# Altium PCB PCB1.PcbDoc
Units mm, origin at the board's own origin, x right, y up, seen from the top; angles counter-clockwise.
Board outline 152.4 x 101.6 mm, 2 copper layers (Top Layer, Bottom Layer); 27 components, 34 nets, 126 pads, 0 vias.
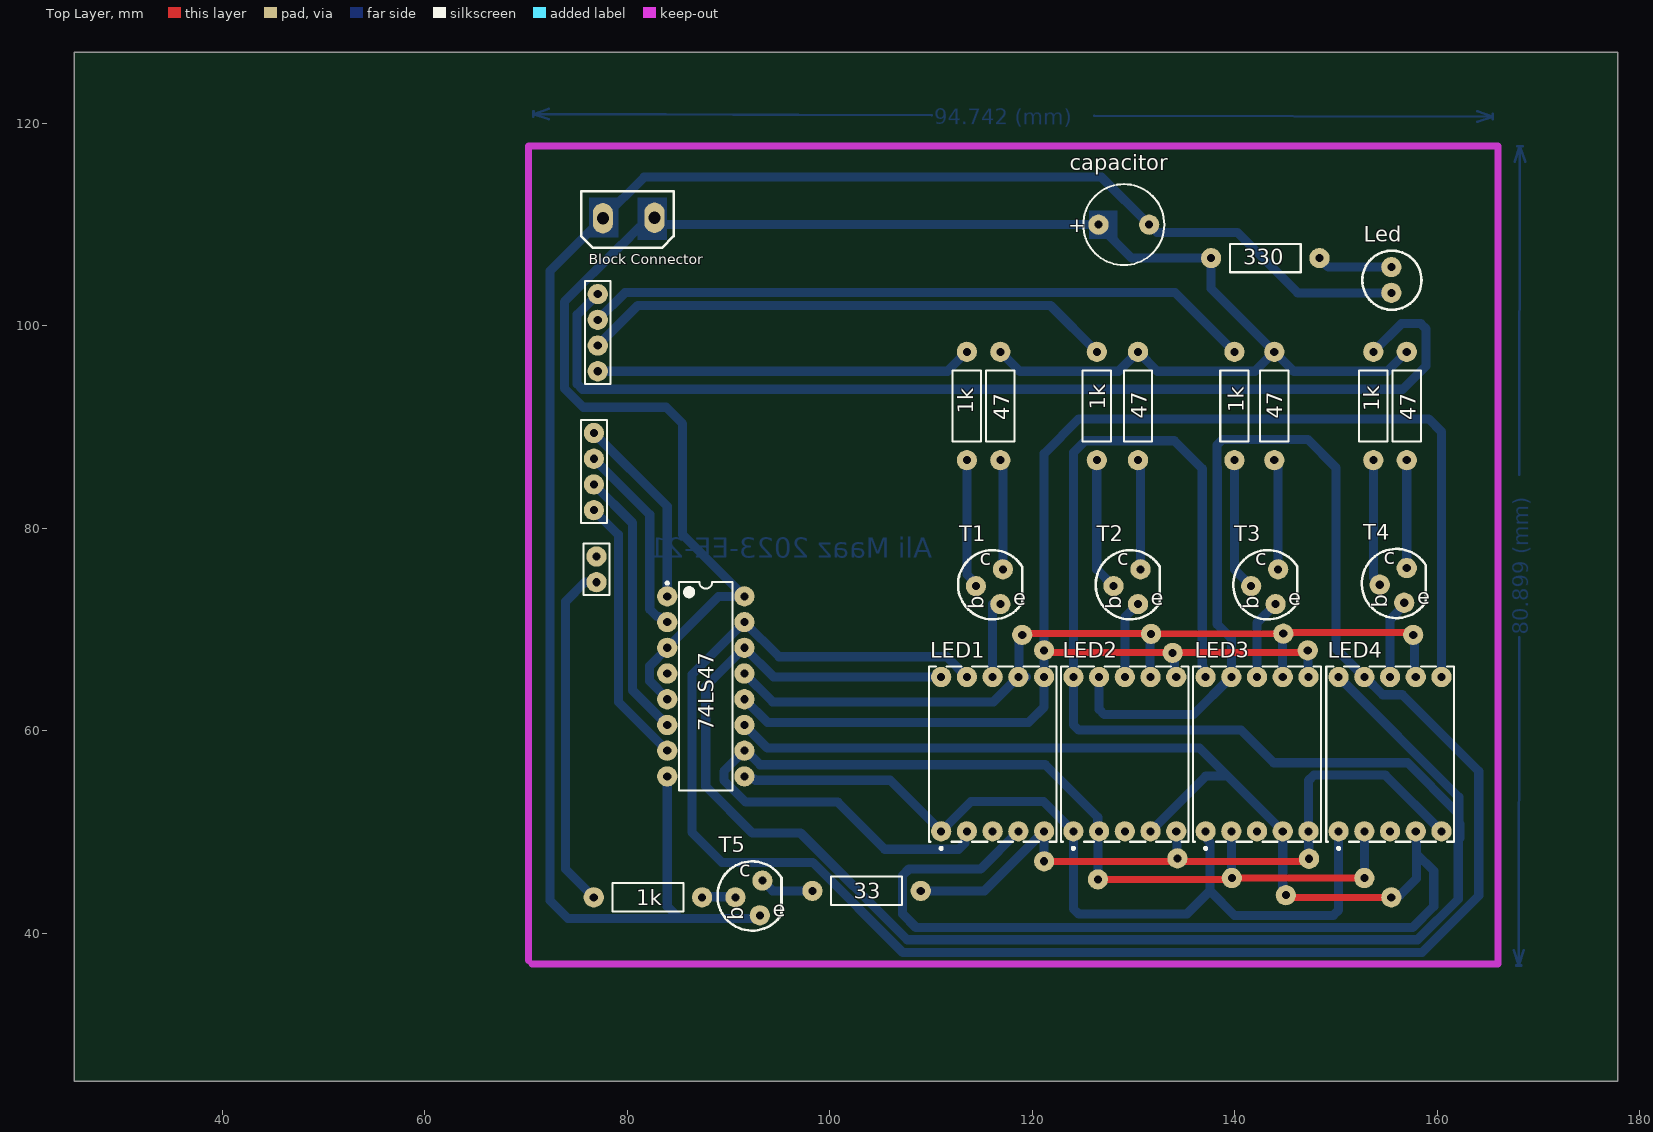
[diagram p0: Top Layer view]
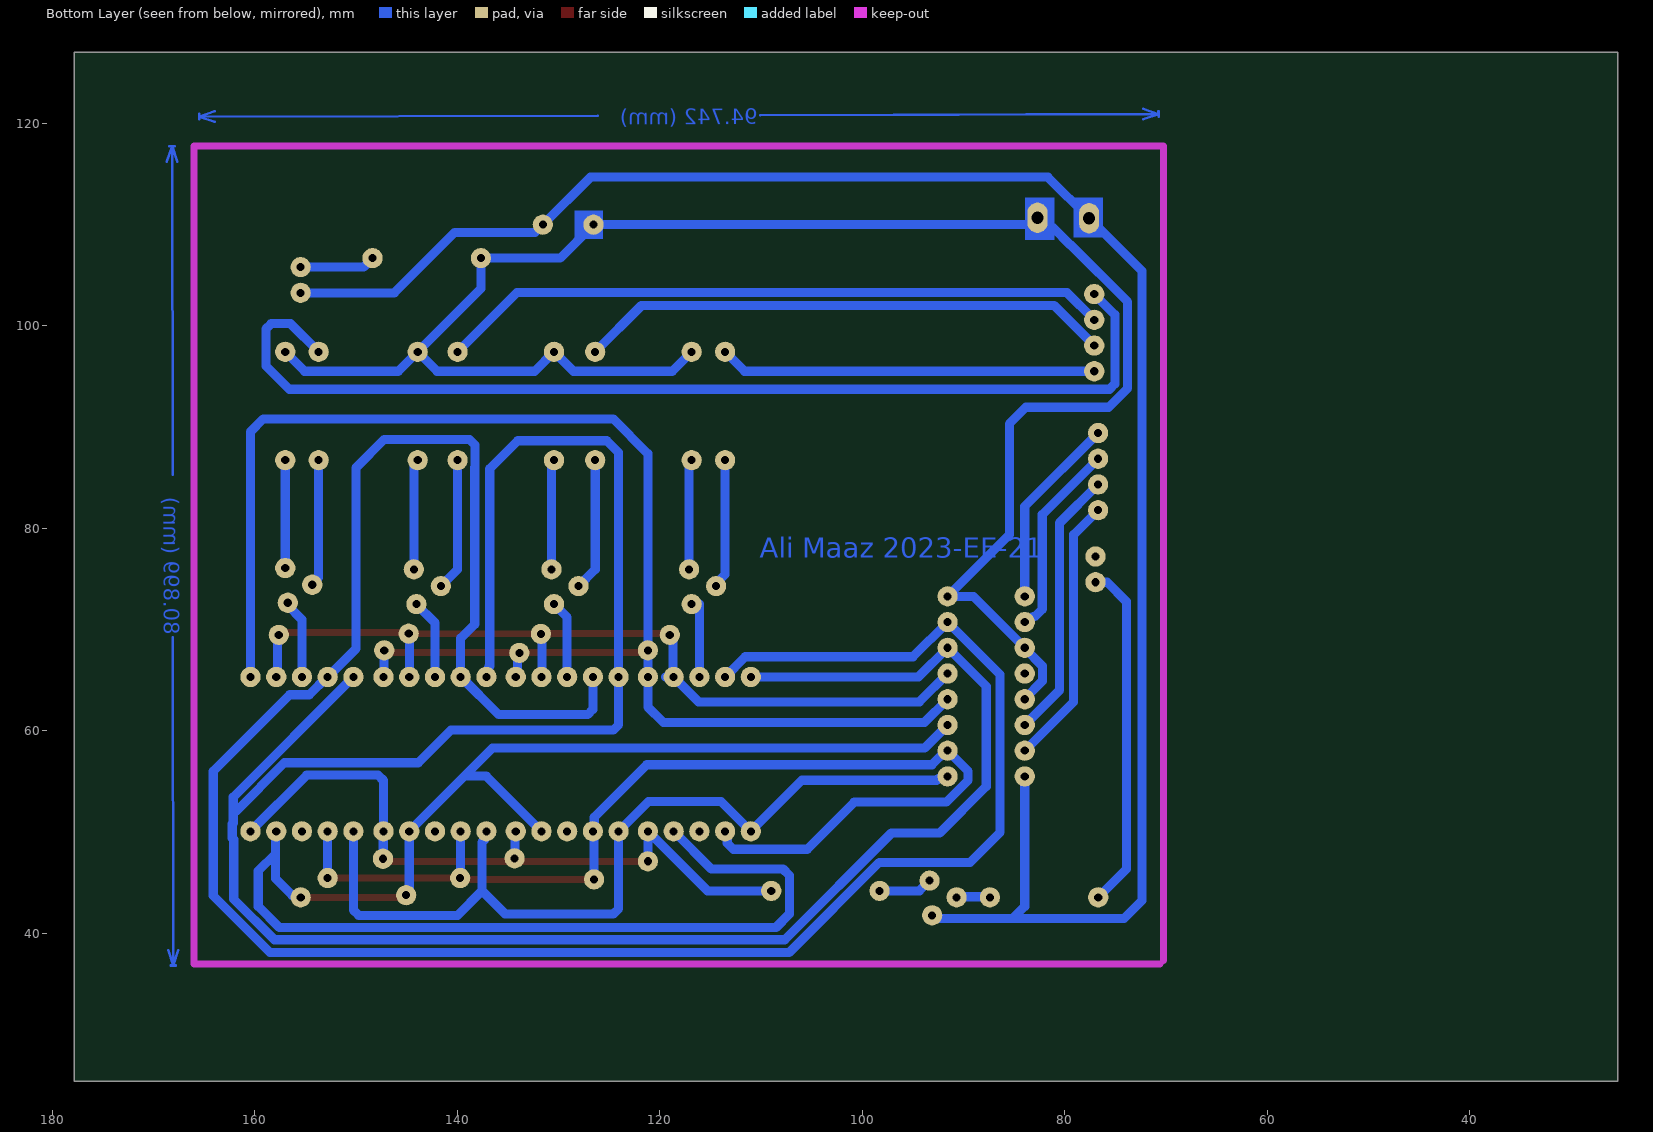
[diagram p1: Bottom Layer view, seen from below]

## Layer stack, top to bottom
Top Solder: solder mask 0.0102, Solder Resist, Dk 3.5
Top Layer: signal copper 0.0356
Dielectric 1: dielectric 0.32, FR-4, Dk 4.8
Bottom Layer: signal copper 0.0356
Bottom Solder: solder mask 0.0102, Solder Resist, Dk 3.5

## Board outline
25.4,25.4 177.8,25.4 177.8,127 25.4,127

## Design rules (kind name [scope] priority, off if disabled: settings)
Clearance [All] p1: gap=0.3 ignorepadtopadclearanceinfootprint=FALSE
PolygonConnect [All] p1: connectstyle=Relief reliefconductorwidth=0.254 reliefentries=4 polygonreliefangle="90 Angle" airgapwidth=0.254
RoutingVias [All] p1: holewidth=0.711 width=1.27 viastyle="Through Hole" minholewidth=0.711 minwidth=1.27 maxholewidth=0.711 maxwidth=1.27
SolderMaskExpansion [All] p1: expansion=0.102 istentingtop=FALSE
Width [All] p1: maxlimit=1 minlimit=0.254 preferedwidth=0.9 toplayer_prefwidth=0.6 bottomlayer_minwidth=0.7 minimp=50.000000 maximp=50.000000 favimp=50.000000
30 further rules are at their usual default settings.

## Components (designator, comment, footprint, x,y, rotation, side; value= is the part's Value field where it differs from the comment)
1k "Comment" RES10.7-7X2.8 82.042,43.561 r0 top
1k "Comment" RES10.7-7X2.8 153.67,92.075 r90 top
1k "Comment" RES10.7-7X2.8 139.954,92.075 r90 top
1k "Comment" RES10.7-7X2.8 126.365,92.075 r270 top
1k "Comment" RES10.7-7X2.8 113.538,92.075 r90 top
33 "Comment" RES10.7-7X2.8 103.632,44.196 r0 top
47 "Comment" RES10.7-7X2.8 156.972,92.075 r90 top
47 "Comment" RES10.7-7X2.8 143.891,92.075 r90 top
47 "Comment" RES10.7-7X2.8 130.429,92.075 r90 top
47 "" RES10.7-7X2.8 116.84,92.075 r90 top
74LS47 "Comment" DIP-16 87.757,64.389 r0 top
330 "Comment" RES10.7-7X2.8 143.002,106.68 r0 top
capacitor "Comment" CAPPR5-8x5 129.032,109.982 r0 top
Led "Comment" LED 155.448,104.521 r0 top
LED1 "Comment" LEDDIP-10/14.27RHD 116.078,57.697 r0 top
LED2 "Comment" LEDDIP-10/14.27RHD 129.132,57.697 r0 top
LED3 "Comment" LEDDIP-10/14.27RHD 142.187,57.697 r0 top
LED4 "Comment" LEDDIP-10/14.27RHD 155.321,57.697 r0 top
T1 "Comment" "TO-92 Packaging" 115.76,74.231 r0 top
T2 "Comment" "TO-92 Packaging" 129.35,74.231 r0 top
T3 "Comment" "TO-92 Packaging" 142.939,74.231 r0 top
T4 "Comment" "TO-92 Packaging" 155.638,74.358 r0 top
T5 "Comment" "TO-92 Packaging" 92.011,43.497 r0 top
? "Comment" HDR1X2 76.962,77.216 r270 top
? "Comment" HDR1X4 76.708,81.788 r90 top
? "Comment" HDR1X4 77.089,95.504 r90 top
? "Comment" "PCB Block Connector" 80.144,110.64 r0 top

## Footprints (in the part's own frame and the unit in brackets; to place one, negate y for a bottom-side part, rotate by r counter-clockwise, add the part's x,y. Pads: shape width x height; smd on the part's side, far side on the other; paste and mask are expansions set on the pad)
CAPPR5-8x5 [mm] "Capacitor, Electrolytic, Radial; Body 8 x 5 mm (Dia.xH typ); Pin Spacing 5 mm (typ)"
  round 2 hole 0.8: 1(-2.5,0) 2(2.5,0)
  silkscreen extent -4,-4 4,4
DIP-16 [mm] "DIP; 16 Leads; Row Spacing 7.62 mm; Pitch 2.54 mm"
  round 2 hole 0.8: 1(-3.81,8.89) 2(-3.81,6.35) 3(-3.81,3.81) 4(-3.81,1.27) 5(-3.81,-1.27) 6(-3.81,-3.81) 7(-3.81,-6.35) 8(-3.81,-8.89) 9(3.81,-8.89) 10(3.81,-6.35) 11(3.81,-3.81) 12(3.81,-1.27) 13(3.81,1.27) 14(3.81,3.81) 15(3.81,6.35) 16(3.81,8.89)
  silkscreen extent -3.93,-10.3 2.65,10.31, body extent -3.6,-10.28 3.6,10.28, height 5.08
HDR1X2 [mm]
  round 2 hole 0.8: 1(0,0) 2(2.54,0)
  silkscreen extent -1.27,-1.27 3.81,1.27
HDR1X4 [mm] "Connector; Header; 4 Position"
  round 2 hole 0.8: 1(0,0) 2(2.54,0) 3(5.08,0) 4(7.62,0)
  silkscreen extent -1.27,-1.27 8.89,1.27
LED [mm]
  round 2 hole 0.8: 1(0,1.27) 2(0,-1.27)
  silkscreen extent -2.87,-2.95 2.98,2.89
LEDDIP-10/14.27RHD [mm] "LED, 7-Segment Display, 14.27 mm, RHD; 10 Leads; Row Space 15.24 mm; Pitch 2.54 mm"
  round 2 hole 0.8: 1(-5.08,-7.62) 2(-2.54,-7.62) 3(0,-7.62) 4(2.54,-7.62) 5(5.08,-7.62) 6(5.08,7.62) 7(2.54,7.62) 8(0,7.62) 9(-2.54,7.62) 10(-5.08,7.62)
  silkscreen extent -6.3,-9.42 6.3,8.65, body extent -6.3,-8.65 6.3,8.65, height 8.3
"PCB Block Connector" [mm]
  oval 2x3 hole 1.2: 1(-2.547,-0.023) 2(2.547,0.023)
  silkscreen extent -4.7,-2.94 4.44,2.65
RES10.7-7X2.8 [mm] "Resistor, Axial; Body 7 x 2.8 mm (LxDia. max), Lead Dia. 0.7 mm (max)"
  round 2 hole 0.8: 1(-5.35,0) 2(5.35,0)
  silkscreen extent -3.5,-1.4 3.5,1.4
"TO-92 Packaging" [mm] "for 2N3904"
  round 2 hole 0.8: T(-1.333,0.064) T(1.079,-1.714) T(1.333,1.714)
  silkscreen extent -3.1,-3.23 3.22,3.61

## Free pads (board coordinates)
  round 2 hole 0.8: 3(118.999,69.469) 4(131.724,69.571) 5(144.78,69.596) 6(157.607,69.469) 7(133.858,67.691) 8(147.193,67.945) 9(121.158,67.945) 10(121.158,47.117) 12(134.328,47.409) 13(134.328,47.409) 14(134.328,47.409) 16(147.32,47.371) 20(126.479,45.326) 21(139.7,45.466) 22(152.781,45.466) 23(145.034,43.772) 24(155.444,43.557)

## Nets (pads, with @x,y where several pads share a name; then routed paths per layer and width w, separated by ;. In a path a pad name is that pad's centre, name@x,y a point inside that pad or via, vN(x,y) a via of type N, cw(c..) or ccw(c..) an arc to the next point about the centre after c; other vN are vias at no path point)
a: 47.2 74LS47.3 74LS47.5 74LS47.16 330.1 ?.2@82.691,110.662 capacitor.1 | length 183.4
  Bottom Layer w0.9: 74LS47.5 83.947,63.181 82.197,64.931 82.197,66.384 83.947,68.134 74LS47.3 89.027,73.279 74LS47.16 85.471,79.375 85.471,90.308 83.831,91.948 75.665,91.948 73.787,93.826 73.787,102.362 79.387,107.962 79.432,107.962 81.149,109.68 81.911,109.68 82.447,110.217 82.447,110.662 82.691,110.662 83.371,109.982 capacitor.1 129.834,106.68 330.1 137.652,103.664 47.2@143.891,97.425 ; 47.2@116.84,97.425 118.761,95.504 128.508,95.504 130.429,97.425 132.35,95.504 141.97,95.504 47.2@143.891,97.425 ; 47.2@156.972,97.425 155.051,95.504 145.812,95.504 47.2@143.891,97.425
a2: 330.2 Led.1 | length 7.5
  Bottom Layer w0.9: 330.2 149.241,105.791 Led.1
a3: 1k.2@87.392,43.561 T5.T@90.678,43.561 | length 3.4
  Bottom Layer w0.9: 1k.2@87.392,43.561 87.447,43.616 90.075,43.616 90.075,43.561 T5.T@90.678,43.561
a4: 1k.1@76.692,43.561 ?.2@76.962,74.676 | length 33.2
  Bottom Layer w0.9: 75.946,74.676 75.819,74.676 73.914,72.771 73.914,46.339 1k.1@76.692,43.561
b: 1k.1@113.538,86.725 T1.T@114.427,74.295 | length 12.8
  Bottom Layer w0.9: 1k.1@113.538,86.725 113.538,75.452 114.427,74.563 T1.T@114.427,74.295
b1: 1k.2@126.365,86.725 T2.T@128.016,74.295 | length 13.1
  Bottom Layer w0.9: 1k.2@126.365,86.725 126.365,75.946 T2.T@128.016,74.295
b2: 1k.1@139.954,86.725 T3.T@141.605,74.295 | length 13.1
  Bottom Layer w0.9: 1k.1@139.954,86.725 139.954,75.946 T3.T@141.605,74.295
b3: 1k.1@153.67,86.725 T4.T@154.305,74.422 | length 12.8
  Bottom Layer w0.9: 1k.1@153.67,86.725 153.67,75.144 154.305,74.509 T4.T@154.305,74.168
c: LED1.8 T1.T@116.84,72.517 | length 8
  Bottom Layer w0.9: LED1.8 116.078,72.517 T1.T@116.84,72.517
c1: LED2.8 T2.T@130.429,72.517 | length 7.7
  Bottom Layer w0.9: LED2.8 129.132,71.22 T2.T@130.429,72.517
c2: LED3.8 T3.T@144.018,72.517 | length 8
  Bottom Layer w0.9: LED3.8 142.187,70.672 144.018,72.503 T3.T@144.018,72.517
c3: LED4.8 T4.T@156.718,72.644 | length 7.7
  Bottom Layer w0.9: LED4.8 155.321,70.993 T4.T@156.718,72.39
co: 47.1@116.84,86.725 T1.T@117.094,75.946 | length 11
  Bottom Layer w0.9: 47.1@116.84,86.725 116.84,86.35 117.094,86.35 T1.T@117.094,75.946
co1: 47.1@130.429,86.725 T2.T@130.683,75.946 | length 10.9
  Bottom Layer w0.9: 47.1@130.429,86.725 130.573,86.581 130.573,86.051 130.683,85.941 T2.T@130.683,75.946
co2: 47.1@143.891,86.725 T3.T@144.272,75.946 | length 10.9
  Bottom Layer w0.9: 47.1@143.891,86.725 143.891,86.522 144.272,86.141 T3.T@144.272,75.946
co3: 47.1@156.972,86.725 T4.T@156.972,76.073 | length 10.9
  Bottom Layer w0.9: T4.T@156.972,75.819 47.1@156.972,86.725
d: 1k.2@113.538,97.425 ?.1@77.089,95.504 | length 37.2
  Bottom Layer w0.9: ?.1@77.089,95.504 111.617,95.504 1k.2@113.538,97.425
d1: 1k.1@126.365,97.425 ?.2@77.089,98.044 | length 52.8
  Bottom Layer w0.9: ?.2@77.089,98.044 81.043,101.998 121.792,101.998 1k.1@126.365,97.425
d2: 1k.2@139.954,97.425 ?.3@77.089,100.584 | length 66.4
  Bottom Layer w0.9: ?.3@77.089,100.584 79.779,103.274 134.105,103.274 1k.2@139.954,97.425
d3: 1k.2@153.67,97.425 ?.4@77.089,103.124 | length 104.9
  Bottom Layer w0.9: ?.4@77.089,103.124 75.057,101.092 75.057,94.253 75.584,93.726 156.562,93.726 158.877,96.041 158.877,99.676 158.35,100.203 156.448,100.203 1k.2@153.67,97.425
do: 33.2 LED1.5 LED2.5 LED3.5 LED4.5 pad.10 pad.12 pad.13 pad.14 pad.16 | length 70.9
  Top Layer w0.7: LED1.5@121.031,49.95 LED1.5 ; pad.10 133.735,47.117 134.116,47.498 pad.14 134.706,47.409 134.999,47.117 146.457,47.117 146.921,47.582 pad.16 ; LED2.5 LED2.5@134.261,50.028 ; LED3.5 LED3.5@147.342,50.002
  Bottom Layer w0.9: 33.2 115.277,44.196 120.755,49.674 121.094,50.013 LED1.5 121.158,47.669 120.904,47.415 pad.10 ; LED2.5 134.289,50 134.289,47.575 pad.14 ; pad.16 147.293,47.652 147.293,50.05 LED3.5 147.267,55.099 147.794,55.626 154.852,55.626 LED4.5
f: 74LS47.15 LED1.9 LED2.9 LED3.9 LED4.9 | length 236
  Bottom Layer w0.9: LED1.9 111.545,67.31 94.996,67.31 74LS47.15 86.38,65.552 86.38,49.984 89.348,47.015 98.309,47.015 107.225,38.1 158.461,38.1 164.084,43.723 164.084,56.007 156.524,63.567 154.596,63.567 152.846,65.317 LED4.9 149.987,68.111 149.987,85.979 147.193,88.773 138.788,88.773 138.25,88.235 138.25,86.036 138.261,86.025 138.261,70.527 139.647,69.141 LED3.9 139.612,65.317 135.89,61.595 127.119,61.595 126.592,62.122 LED2.9
g: 74LS47.14 LED1.10 LED2.10 LED3.10 LED4.10 | length 248.4
  Bottom Layer w0.9: LED1.10 94.449,65.317 74LS47.14 87.757,64.389 87.757,54.508 92.354,49.911 97.111,49.911 107.652,39.37 158.034,39.37 162.052,43.388 162.052,49.253 162.204,49.405 162.204,50.795 162.105,50.894 162.105,52.026 162.105,53.453 LED4.10 ; LED3.10 136.896,65.527 136.896,66.277 136.779,66.394 136.779,85.875 134.008,88.646 125.222,88.646 124.052,87.476 LED2.10 124.052,60.598 124.579,60.071 140.614,60.071 143.84,56.845 157.055,56.845 161.874,52.026
gnd: 74LS47.8 ?.1@77.597,110.617 capacitor.2 Led.2 T5.T@93.091,41.783 | length 190.1
  Bottom Layer w0.9: 74LS47.8 83.947,42.672 85.166,41.453 ; T5.T@93.091,41.783 93.091,41.453 85.166,41.453 ; Led.2 146.202,103.251 140.233,109.22 132.294,109.22 capacitor.2 126.833,114.681 81.661,114.681 77.597,110.617 72.39,105.41 72.39,43.231 74.168,41.453 85.166,41.453
k1: 74LS47.1 ?.4@76.708,89.408 | length 19.1
  Bottom Layer w0.9: ?.4@76.708,89.408 83.947,82.169 74LS47.1
k2: 74LS47.2 ?.3@76.708,86.868 | length 19.4
  Bottom Layer w0.9: ?.3@76.708,86.868 82.22,81.356 82.22,72.011 82.957,71.273 83.115,71.273 83.649,70.739 74LS47.2
k3: 74LS47.6 ?.2@76.708,84.328 | length 26.7
  Bottom Layer w0.9: ?.2@76.708,84.328 80.518,80.518 80.518,64.008 74LS47.6
k4: 74LS47.7 ?.1@76.708,81.788 | length 26.7
  Bottom Layer w0.9: ?.1@76.708,81.788 79.121,79.375 79.121,62.865 74LS47.7
p: 74LS47.13 LED1.7 LED2.7 LED3.7 LED4.7 pad.3 pad.4 pad.5 pad.6 | length 86.2
  Top Layer w0.7: pad.3 119.248,69.601 120.054,69.601 120.059,69.596 131.699,69.596 pad.4 pad.5 144.902,69.591 145.581,69.591 145.713,69.723 157.001,69.723 157.255,69.469 pad.6 ; LED2.7@131.622,65.367 LED2.7
  Bottom Layer w0.9: 74LS47.13 94.361,62.865 116.166,62.865 LED1.7 ; pad.3 118.681,69.151 118.681,65.38 LED1.7 ; LED1.7@119.408,65.317 LED1.7 ; LED2.7 131.622,65.367 131.622,69.292 pad.4 ; LED3.7@144.78,65.37 LED3.7 144.69,65.354 144.69,69.305 pad.5 ; pad.6 157.734,69.342 157.734,65.444 LED4.7 LED4.7@157.924,65.38
q: 74LS47.12 LED1.6 LED2.6 LED3.6 LED4.6 pad.7 pad.8 pad.9 | length 153.6
  Top Layer w0.7: LED1.6@121.031,65.444 LED1.6 ; pad.9 121.361,67.742 133.807,67.742 pad.7 133.909,67.742 146.99,67.742 pad.8 ; LED2.6 LED2.6@134.366,65.471
  Bottom Layer w0.9: 74LS47.12 93.853,60.833 119.634,60.833 121.158,62.357 LED1.6 pad.9 121.158,87.376 124.587,90.805 159.131,90.805 160.401,89.535 LED4.6 ; pad.7 134.035,67.514 134.035,65.494 LED2.6 ; pad.8 147.23,67.908 147.23,65.354 LED3.6 LED3.6@147.376,65.427
r: 33.1 T5.T@93.345,45.212 | length 5.4
  Bottom Layer w0.9: T5.T@93.345,45.212 94.361,44.196 33.1
x: 74LS47.9 LED1.1 LED2.1 LED3.1 LED4.1 | length 87.2
  Bottom Layer w0.9: 74LS47.9 91.777,55.289 92.474,55.289 92.644,55.118 105.957,55.118 LED1.1 113.931,53.01 121.119,53.01 LED2.1 124.052,42.437 124.579,41.91 135.255,41.91 137.541,44.196 ; LED3.1 137.317,49.866 137.317,49.224 137.541,49 137.541,44.196 ; LED4.1 150.241,42.311 149.714,41.784 139.953,41.784 137.541,44.196
y: 74LS47.10 LED1.2 LED2.2 LED3.2 LED4.2 pad.20 pad.21 pad.22 | length 111.9
  Top Layer w0.7: pad.20 126.492,45.339 139.573,45.339 pad.21 pad.22 ; LED3.2 LED3.2@139.7,50.13 ; LED4.2 LED4.2@152.781,50.414
  Bottom Layer w0.9: LED1.2 113.328,49.866 113.328,48.912 112.726,48.311 105.43,48.311 100.782,52.959 91.697,52.959 89.535,55.121 89.535,56.007 74LS47.10 91.729,58.039 93.115,56.653 121.274,56.653 126.459,51.468 126.459,50.21 LED2.2 126.479,49.963 pad.20 ; LED3.2 139.673,50.05 139.673,45.493 pad.21 ; LED4.2@152.698,49.994 LED4.2 pad.22
z: 74LS47.11 LED1.4 LED2.4 LED3.4 LED4.4 pad.23 pad.24 | length 169.7
  Top Layer w0.7: pad.23 145.249,43.557 pad.24
  Bottom Layer w0.9: 74LS47.11 93.853,58.293 136.511,58.293 139.279,55.524 ; LED1.4 114.896,46.355 107.823,46.355 107.188,45.72 107.188,41.91 108.514,40.584 157.551,40.584 159.639,42.672 159.639,46.164 157.924,47.879 ; LED2.4 137.12,55.524 139.279,55.524 ; pad.23 145.034,43.476 144.727,43.783 LED3.4 139.279,55.524 ; pad.24@155.762,43.24 155.762,43.577 155.952,43.768 156.29,43.768 157.924,45.402 157.924,47.879 ; LED4.4 157.924,50.013 157.924,47.879
pads on no net: 74LS47.4 ?.1@76.962,77.216 LED1.3 LED2.3 LED3.3 LED4.3
copper on no net: | length 158.4
  Bottom Layer w0.254: 70.738,120.65 70.74,121.158 ; 72.262,120.392 70.739,120.904 ; 72.264,121.408 70.739,120.904 ; 110.086,120.799 70.739,120.904 ; 126.134,120.755 165.481,120.65 ; 163.956,120.146 165.481,120.65 ; 163.958,121.162 165.481,120.65 ; 165.48,120.396 165.482,120.904 ; 167.515,38.355 168.021,36.83 ; 167.638,116.206 168.148,117.729 ; 167.767,36.83 168.275,36.83 ; 167.894,117.729 168.402,117.729 ; 168.072,69.256 168.021,36.83 ; 168.097,85.303 168.148,117.729 ; 168.531,38.353 168.021,36.83 ; 168.654,116.204 168.148,117.729

## Keep-outs
Keep-Out Layer:
  lines w0.254: 70.231,37.338 70.612,36.957
  lines w0.7: 70.231,37.338 70.231,117.729 165.989,117.729 165.989,37.084 ; 70.612,36.957 165.989,36.957

## Other copper
Bottom Layer:
  rectangle net a: 125.603,108.585 128.397,111.379
  rectangle net a: 81.026,108.458 83.947,112.649
  rectangle net gnd: 76.2,108.712 79.121,112.649
  text "94.742 (mm)" at 110.338,119.884 h1.52 r359.85
  text "Ali Maaz 2023-EE-21" at 110.133,77.085 h2
  text "80.899 (mm)" at 168.986,69.508 h1.52 r89.91

## Text inside footprints (layer, text, board x,y; h text height)
capacitor: Top Overlay "+" at 123.557,109.232 h1.5
T1: Top Overlay "c" at 114.808,76.327 h1.5; Top Overlay "e" at 118.11,72.39 h1.5; Top Overlay "b" at 115.189,72.009 h1.52 r90
T2: Top Overlay "c" at 128.397,76.327 h1.5; Top Overlay "e" at 131.699,72.39 h1.5; Top Overlay "b" at 128.778,72.009 h1.52 r90
T3: Top Overlay "c" at 141.986,76.327 h1.5; Top Overlay "e" at 145.288,72.39 h1.5; Top Overlay "b" at 142.367,72.009 h1.52 r90
T4: Top Overlay "c" at 154.686,76.454 h1.5; Top Overlay "e" at 157.988,72.517 h1.5; Top Overlay "b" at 155.067,72.136 h1.52 r90
T5: Top Overlay "c" at 91.059,45.593 h1.5; Top Overlay "e" at 94.361,41.656 h1.5; Top Overlay "b" at 91.44,41.275 h1.52 r90
?: Top Overlay "Block Connector" at 76.207,106.068 h1.02